# EAGLE board pinkyMount Device2 (EAGLE 8.0.1)
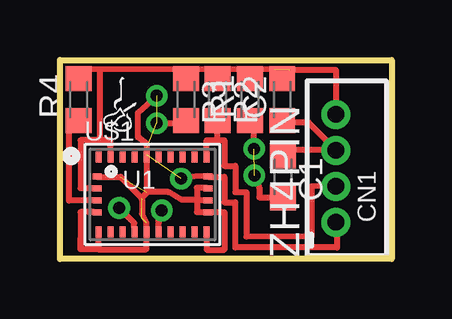
[diagram p0: board, top side]
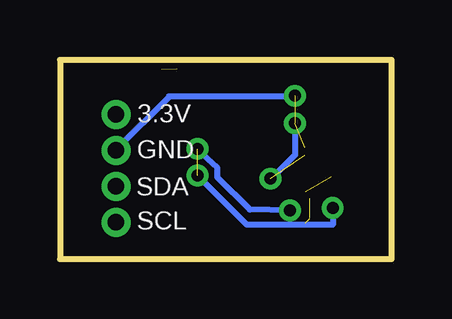
[diagram p1: board, bottom side, seen from below]

Size 13.84 x 8.31 mm. Coordinates in mm from the lower left corner, seen from the top.
Outline: 0,0 0,8.31 13.84,8.31 13.84,0 0,0
Copper layers (1*16): Top 0.035mm / dielectric 1.5mm / Bottom 0.035mm
Design rules "default": minimum track width 10mil, minimum drill 24mil, track to track 8mil, track to pad 8mil, pad to pad 8mil, via to via 8mil, smd to smd 8mil, copper to edge 40mil, drill to drill 8mil, minimum pad ring 10mil, minimum via ring 8mil, stop-mask expansion 4mil, vias tented up to drill 0mil, thermal gap 10mil

## Footprints (pad centres in the part's own frame; a part is rotated, then mirrored left to right if it is on the bottom)
C0603K = smd 1.05 x 1.08: 1 -0.875,0; 2 0.875,0
BNO055 = smd 0.25 x 0.475: 1 -2.25,1.562; 6 -2.25,-1.562; 7 -1.75,-1.562; 8 -1.25,-1.562; 9 -0.75,-1.562; 10 -0.25,-1.562; 11 0.25,-1.562; 12 0.75,-1.562; 13 1.25,-1.562; 14 1.75,-1.562; 15 2.25,-1.562; 20 2.25,1.562; 21 1.75,1.562; 22 1.25,1.562; 23 0.75,1.562; 24 0.25,1.562; 25 -0.25,1.562; 26 -0.75,1.562; 27 -1.25,1.562; 28 -1.75,1.562 | smd 0.375 x 0.25: 2 -2.312,0.75; 3 -2.312,0.25; 4 -2.312,-0.25; 5 -2.312,-0.75; 16 2.312,-0.75; 17 2.312,-0.25; 18 2.312,0.25; 19 2.312,0.75
B4B-ZR = drill 0.7 pad 1.1: 1 -2.25,0; 2 -0.75,0; 3 0.75,0; 4 2.25,0

## Placement (x,y rotation side)
C1  [C0603K]  9.3,3.43 270 top
C2  [C0603K]  9.27,6.65 90 top
R1  [C0603K]  7.92,6.65 90 top
R2  [C0603K]  6.58,6.65 270 top
R3  [C0603K]  5.26,6.65 270 top
R4  [C0603K]  0.79,6.65 90 top
U$1  BNO055  [BNO055]  3.86,2.69 0 top
ZH4PIN  [B4B-ZR]  11.51,3.78 90 top

## Library data of the parts
C1 C2 R1-R4 = ref-packages
U$1 = microbuilder
ZH4PIN = con-jst

## Tracks (layer width: path | path; a pad name or v marks a point on that pad's centre or on a via)
CAP  (via drill 0.5)  (1 unrouted)
  Top 0.254: 3.1,1.32 3.1,1.5 v2.46,2.13 | v8.1,4.6 8.1,5.46
  Bottom 0.254: v2.46,2.13 2.46,1.42 6.04,1.42 v8.11,3.49
S$1
  Top 0.254: 1.42,1.96 0.86,1.96 0.86,0.48
S$2
  Top 0.254: 1.55,2.44 0.38,2.44 0.38,5.38
S$3
  Top 0.254: 4.01,5.66 5,5.66
S$4
  Top 0.254: 1.6,0.96 1.6,0.41 3.61,0.41 3.61,0.96
S$5  (1 unrouted)
  Top 0.254: 6.12,0.96 6.12,0.38 6.86,0.38 6.86,1.96 5.71,1.96 5.71,2.44 | 6.1,2.44 5.71,2.44 | 6.12,2.97 5.71,2.97 5.71,2.46 | 5.71,2.46 5.71,2.44 | 3.61,4.14 3.61,2.79 4.52,2.79 5.08,2.46 5.71,2.46 | 1.55,3.43 2.52,3.43
S$6
  Bottom 0.254: 4.04,5.64 4.04,4.34 5.08,3.3
S$7
  Top 0.254: 2.11,4.27 2.11,4.95 0.86,4.95 0.86,2.95 1.55,2.95
S$8
  Top 0.254: 4.12,1.19 4.12,1.5
S$10  (1 unrouted)
  Top 0.254: 8.97,7.92 1.68,7.9 | 1.68,7.9 0.46,7.92 | 9.6,7.9 11.51,7.9 11.51,6.1 | 1.68,5 1.68,7.9
S$11
  Top 0.254: 6.12,4.42 6.12,4.94 6.86,4.94
S$12
  Top 0.254: 11.51,4.52 11.51,4.55 | 11.51,4.55 11.29,4.78 10.37,5.69 9.32,5.69 | 11.51,4.55 9.3,4.55
S$13
  Top 0.254: 3.63,4.67 3.63,4.8 3.25,5.08 3.25,6.1 4.04,6.78
S$14
  Bottom 0.254: 9.27,6.78 11.53,4.52
S$15
  Top 0.254: 6.86,4.95 6.86,3.88
S$16
  Top 0.254: 8.13,3.45 8.13,3.3 8.32,2.98 8.32,2.58 9.27,2.56
S$17
  Top 0.254: 6.58,5.03 6.58,5.74
S$18
  Top 0.254: 11.51,1.55 11.56,1.55 11.56,0.48 7.32,0.48 7.32,2.36 6.86,2.36 6.86,3.43 6.2,3.43
S$19
  Top 0.254: 11.46,3.05 10.5,3.04 10.5,0.93 7.77,0.94 7.77,2.79 7.32,2.79 7.32,3.89 6.86,3.89
S$20
  Top 0.254: 4.12,1.55 4.12,1.91 4.34,2.13
S$21
  Top 0.254: 6.15,3.45 5.11,3.43
S$22
  Bottom 0.254: 4.04,6.78 9.3,6.78
S$23  (1 unrouted)
  Top 0.254: 3.42,2.52 3.41,2.53 3.41,2.55 3.63,2.77
S$24
  Top 0.254: 2.51,3.42 2.54,3.42 3.41,2.55
S$25
  Top 0.254: 3.42,2.48 3.42,1.88 3.61,1.5
S$26  (1 unrouted)
  Top 0.254: 3.61,1.28 3.61,1.51
S$27
  Top 0.254: 1.58,0.4 0.86,0.4 0.86,0.88
SCL_3V3  (via drill 0.5)
  Bottom 0.254: v4.25,2.03 5.92,2.06 7.27,3.41 7.27,3.81 8.1,4.57
SCL_3V4  (via drill 0.5)  (3 unrouted)
  Top 0.254: 3.63,4.34 3.63,4.65
  other vias: 4.04,5.66 5.06,3.35 4.04,6.81

## Text on the board
tPlace: U1 | CN1
bPlace: 3.3V | GND | SDA | SCL